# EAGLE board PDAQV100 (EAGLE 5.06)

Size 100.31 x 100 mm. Coordinates in mm from the lower left corner, seen from the top.
Outline: 0,0 100.31,0 100.31,100 0,100 0,0
Copper layers (1*2)+(15*16): Top 0.035mm / dielectric 1.5mm / Route2 0.035mm / dielectric 0.15mm / Route15 0.035mm / dielectric 0.2mm / Bottom 0.035mm
Design rules "default *": minimum track width 10mil, minimum drill 24mil, track to track 8mil, track to pad 8mil, pad to pad 8mil, via to via 8mil, smd to smd 8mil, copper to edge 40mil, drill to drill 8mil, minimum pad ring 10mil, minimum via ring 8mil, stop-mask expansion 4mil, vias tented up to drill 0mil, thermal gap 10mil

## Footprints (pad centres in the part's own frame; a part is rotated, then mirrored left to right if it is on the bottom)
B/3528-21R = smd 1.95 x 2.5: + 1.525,0; - -1.525,0
C0805 = smd 1.3 x 1.5: 1 -0.95,0; 2 0.95,0
SMB = smd 2.4 x 2.4: A 2.2,0; C -2.2,0
SO8-COOL = smd 0.61 x 1.524: 1 -1.905,-2.743; 2 -0.635,-2.743; 3 0.635,-2.743; 4 1.905,-2.743; 5 1.905,2.743; 6 0.635,2.743; 7 -0.635,2.743; 8 -1.905,2.743
LFCSP48 = smd 0.6 x 0.32: 1 -3.325,2.75; 12 -3.325,-2.75; 25 3.325,-2.75; 36 3.325,2.75 | smd 0.7 x 0.32: 2 -3.3,2.25; 3 -3.3,1.75; 4 -3.3,1.25; 5 -3.3,0.75; 6 -3.3,0.25; 7 -3.3,-0.25; 8 -3.3,-0.75; 9 -3.3,-1.25; 10 -3.3,-1.75; 11 -3.3,-2.25; 26 3.3,-2.25; 27 3.3,-1.75; 28 3.3,-1.25; 29 3.3,-0.75; 30 3.3,-0.25; 31 3.3,0.25; 32 3.3,0.75; 33 3.3,1.25; 34 3.3,1.75; 35 3.3,2.25 | smd 0.32 x 0.6: 13 -2.75,-3.325; 24 2.75,-3.325; 37 2.75,3.325; 48 -2.75,3.325 | smd 0.32 x 0.7: 14 -2.25,-3.3; 15 -1.75,-3.3; 16 -1.25,-3.3; 17 -0.75,-3.3; 18 -0.25,-3.3; 19 0.25,-3.3; 20 0.75,-3.3; 21 1.25,-3.3; 22 1.75,-3.3; 23 2.25,-3.3; 38 2.25,3.3; 39 1.75,3.3; 40 1.25,3.3; 41 0.75,3.3; 42 0.25,3.3; 43 -0.25,3.3; 44 -0.75,3.3; 45 -1.25,3.3; 46 -1.75,3.3; 47 -2.25,3.3 | smd 5.1 x 5.1: EXP 0,0
JP3Q = drill 0.914 octagon: 1 -2.54,-1.27; 2 -2.54,1.27; 3 0,-1.27; 4 0,1.27; 5 2.54,-1.27; 6 2.54,1.27
JP2Q = drill 0.914 octagon: 1 -1.27,-1.27; 2 -1.27,1.27; 3 1.27,-1.27; 4 1.27,1.27
M0805 = smd 1.3 x 1.6: 1 -0.95,0; 2 0.95,0
6POL254 = drill 1.2 pad 1.778 long: 1 -6.35,0; 2 -3.81,0; 3 -1.27,0; 4 1.27,0; 5 3.81,0; 6 6.35,0
2POL254 = drill 1.2 long: 1 -1.27,0; 2 1.27,0

## Placement (x,y rotation side)
C1  10uF  [B/3528-21R]  -59.69,-10.16 0 top  (outside the outline)
C2  10uF  [B/3528-21R]  -59.69,-17.78 0 top  (outside the outline)
C3  10uF  [B/3528-21R]  -59.69,-25.4 0 top  (outside the outline)
C4  10uF  [B/3528-21R]  -59.69,-33.02 0 top  (outside the outline)
C5  1uF  [C0805]  -59.69,-40.64 0 top  (outside the outline)
C6  1uF  [C0805]  -59.69,-46.99 0 top  (outside the outline)
C7  10uF  [B/3528-21R]  -69.85,-76.2 0 top  (outside the outline)
C8  10uF  [B/3528-21R]  -78.74,-83.82 0 top  (outside the outline)
C9  1uF  [C0805]  -62.23,-114.3 0 top  (outside the outline)
C10  1uF  [C0805]  -68.58,-114.3 0 top  (outside the outline)
C11  10uF  [B/3528-21R]  -78.74,-121.92 0 top  (outside the outline)
C12  1uF  [C0805]  -68.58,-144.78 0 top  (outside the outline)
C13  1uF  [C0805]  -62.23,-144.78 0 top  (outside the outline)
C14  10uF  [B/3528-21R]  -87.63,-156.21 0 top  (outside the outline)
C15  10uF  [B/3528-21R]  -96.52,-163.83 0 top  (outside the outline)
C16  10uF  [B/3528-21R]  -105.41,-179.07 0 top  (outside the outline)
D1  ES2D  [SMB]  -104.14,-187.96 0 top  (outside the outline)
IC1  [SO8-COOL]  -57.15,-55.88 0 top  (outside the outline)
IC2  AD7671  [LFCSP48]  -68.58,-53.34 0 top  (outside the outline)
IC3  [SO8-COOL]  -64.77,-99.06 0 top  (outside the outline)
IC4  [SO8-COOL]  -64.77,-129.54 0 top  (outside the outline)
JP1  [JP3Q]  -13.97,1.27 0 top  (outside the outline)
JP2  [JP3Q]  -22.86,1.27 0 top  (outside the outline)
JP3  [JP3Q]  -31.75,1.27 0 top  (outside the outline)
JP4  [JP3Q]  -40.64,1.27 0 top  (outside the outline)
JP5  [JP3Q]  -49.53,1.27 0 top  (outside the outline)
JP6  [JP2Q]  -78.74,-74.93 0 top  (outside the outline)
JP7  [JP2Q]  -87.63,-142.24 0 top  (outside the outline)
JP8  [JP3Q]  -95.25,-153.67 0 top  (outside the outline)
JP9  [JP2Q]  -105.41,-168.91 0 top  (outside the outline)
R1  106.1K  [M0805]  -69.85,-63.5 0 top  (outside the outline)
R2  94.5K  [M0805]  -69.85,-68.58 0 top  (outside the outline)
R3  140K  [M0805]  -68.58,-106.68 0 top  (outside the outline)
R4  78.7K  [M0805]  -59.69,-106.68 0 top  (outside the outline)
R5  106.1K  [M0805]  -68.58,-137.16 0 top  (outside the outline)
R6  94.5K  [M0805]  -60.96,-137.16 0 top  (outside the outline)
R7  [M0805]  -87.63,-151.13 0 top  (outside the outline)
R8  0E  [M0805]  -96.52,-171.45 0 top  (outside the outline)
X1  [6POL254]  0,-3.81 0 top  (outside the outline)
X2  [2POL254]  -77.47,-91.44 0 top  (outside the outline)

## Library data of the parts
C1-C16 R1-R8 = rcl
D1 = diode
IC1-IC4 = LL-Eagle Library
JP1-JP9 = jumper
X1 X2 = con-phoenix-254

## Nets
+2.5V: C13.1 IC4.1 IC4.2 JP7.2 JP8.4 R5.2
+3.3V: C10.1 D1.C IC3.1 IC3.2 JP8.6 JP9.2 R3.2
+12V: JP2.4 JP3.4 JP6.4 X1.4
+VA: C5.1 IC1.7 IC1.8 JP2.6 JP3.2 JP4.6 X1.3
+VS: C8.+ JP6.1 JP6.3
-12V: JP1.4 JP5.6 X1.1
-VA: JP1.6 JP5.4 X1.2
-VS: C7.- JP5.1 JP5.3 JP5.5
AVDD: C4.+ JP4.1 JP4.3 JP4.5 R7.1
DVDD: C14.+ JP7.1 JP7.3 R7.2
EXT: JP4.2 JP6.2 X1.5
GND: C1.+ C2.- C3.- C4.- C5.2 C7.+ C8.- C9.2 C11.- C12.2 C14.- C15.- C16.- IC1.5 IC1.6 IC3.5 IC3.6 IC4.5 IC4.6 JP1.2 JP5.2 R2.1 R4.1 R6.1 X1.6 X2.1
N$1: JP2.2 JP3.6
N$2: C6.1 IC1.1 IC1.2 JP4.4 R1.2
N$3: C6.2 IC1.3 R1.1 R2.2
N$4: C13.2 IC4.3 R5.1 R6.2
N$5: C10.2 IC3.3 R3.1 R4.2
N$6: C15.+ JP8.1 JP8.3 JP8.5 JP9.4 R8.1
OVDD: R8.2
VDIG: C9.1 C11.+ C12.1 IC3.7 IC3.8 IC4.7 IC4.8 JP7.4 JP8.2 X2.2
VDRV+: C2.+ JP2.1 JP2.3 JP2.5
VDRV-: C1.- JP1.1 JP1.3 JP1.5
VIO: C16.+ D1.A JP9.1 JP9.3
VREF+: C3.+ JP3.1 JP3.3 JP3.5

## Tracks (layer width: path | path; a pad name or v marks a point on that pad's centre or on a via)
+2.5V  (5 unrouted)
+3.3V  (6 unrouted)
+12V  (3 unrouted)
+VA  (6 unrouted)
+VS  (2 unrouted)
-12V  (2 unrouted)
-VA  (2 unrouted)
-VS  (3 unrouted)
AVDD  (4 unrouted)
DVDD  (3 unrouted)
EXT  (2 unrouted)
GND  (25 unrouted)
N$1  (1 unrouted)
N$2  (4 unrouted)
N$3  (3 unrouted)
N$4  (3 unrouted)
N$5  (3 unrouted)
N$6  (5 unrouted)
VDIG  (9 unrouted)
VDRV+  (3 unrouted)
VDRV-  (3 unrouted)
VIO  (3 unrouted)
VREF+  (3 unrouted)